# EAGLE board precharge_schematic (EAGLE 9.6.2)
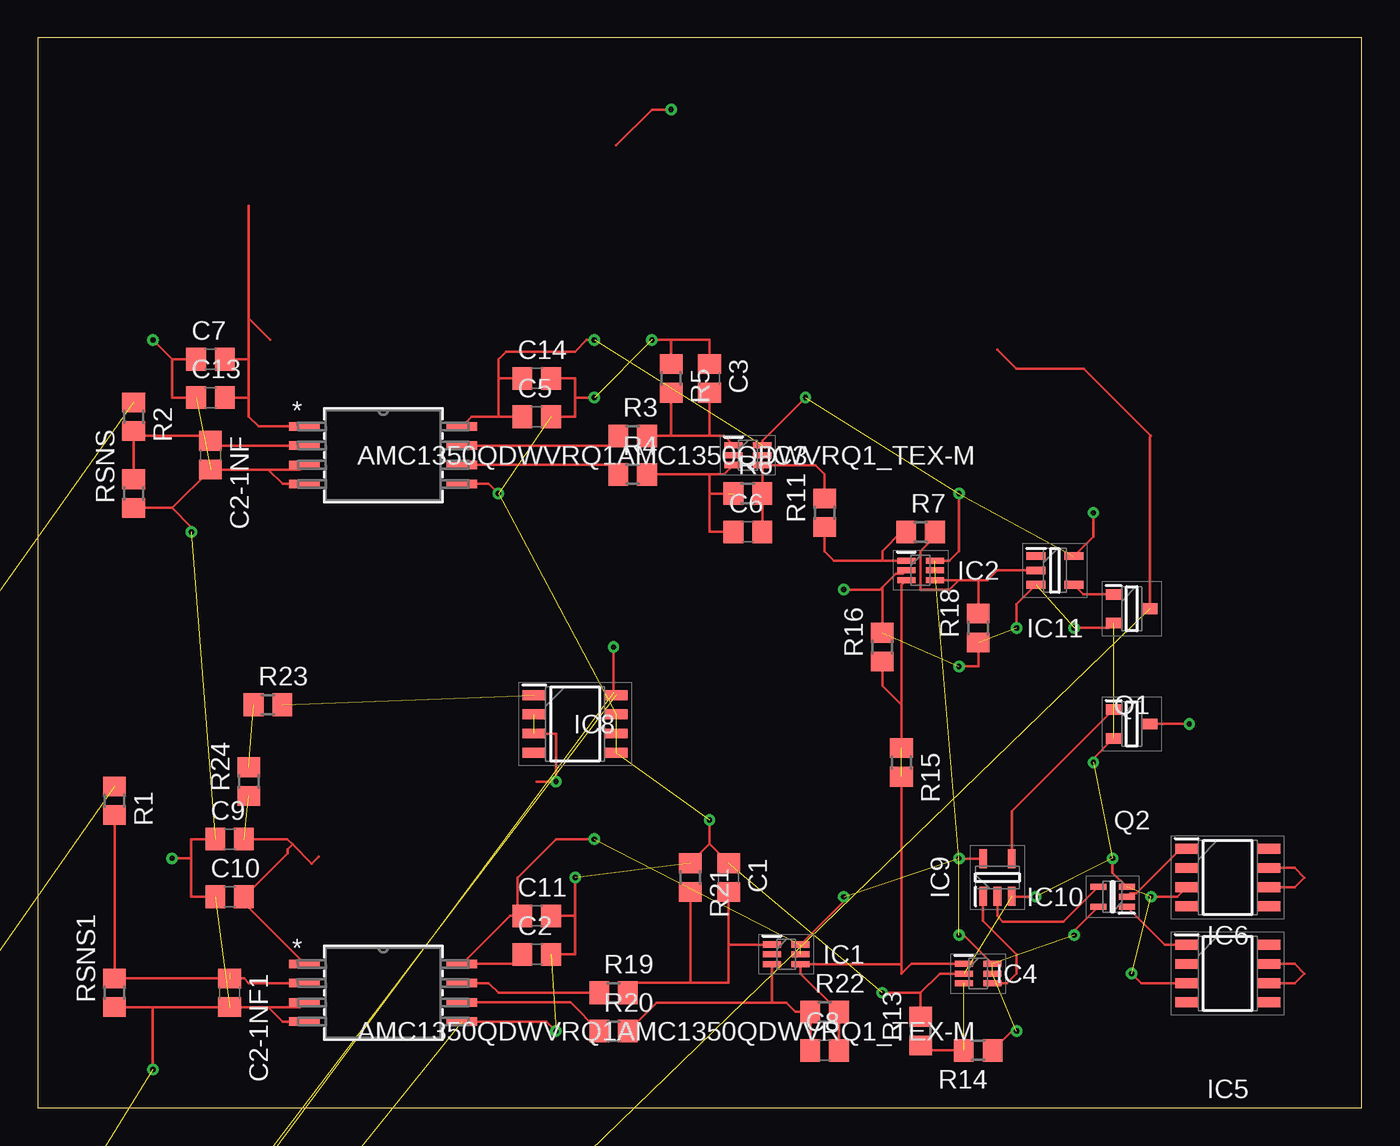
[diagram p0: board, top side]
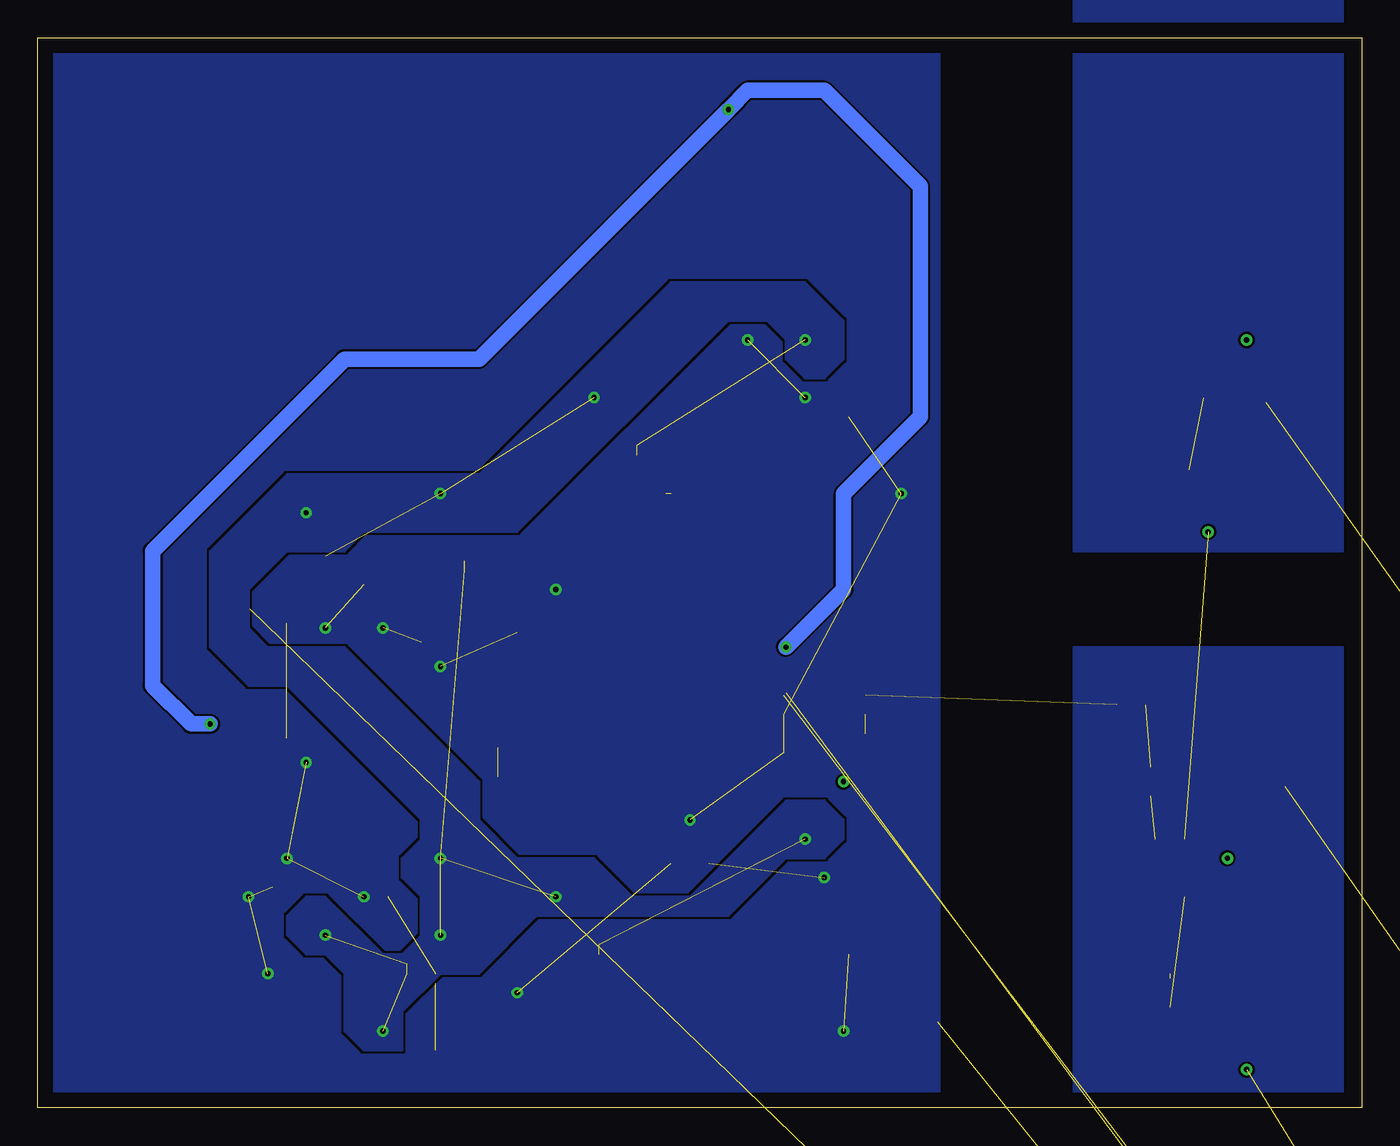
[diagram p1: board, bottom side, seen from below]

Size 87.61 x 70.79 mm. Coordinates in mm from the lower left corner, seen from the top.
Outline: 0,0 87.61,0 87.61,70.79 0,70.79 0,0
Copper layers (1*16): Top 0.035mm / dielectric 1.5mm / Bottom 0.035mm
Design rules "default": minimum track width 6mil, minimum drill 0.35mm, track to track 6mil, track to pad 6mil, pad to pad 6mil, via to via 6mil, smd to smd 6mil, copper to edge 40mil, drill to drill 6mil, minimum pad ring 10mil, minimum via ring 8mil, stop-mask expansion 4mil, vias tented up to drill 0mil, thermal gap 10mil

## Footprints (pad centres in the part's own frame; a part is rotated, then mirrored left to right if it is on the bottom)
C0805 = smd 1.3 x 1.5: 1 -0.95,0; 2 0.95,0
SOT65P210X110-6N = smd 1.2 x 0.4: 1 -0.95,0.65; 2 -0.95,0; 3 -0.95,-0.65; 4 0.95,-0.65; 5 0.95,0; 6 0.95,0.65
SOIC127P599X175-8N = smd 1.526 x 0.65: 1 -2.712,1.905; 2 -2.712,0.635; 3 -2.712,-0.635; 4 -2.712,-1.905; 5 2.712,-1.905; 6 2.712,-0.635; 7 2.712,0.635; 8 2.712,1.905
SOT95P275X110-5N = smd 1.25 x 0.5: 1 -1.25,0.95; 2 -1.25,0; 3 -1.25,-0.95; 4 1.25,-0.95; 5 1.25,0.95
SOT65P212X110-5N = smd 1.05 x 0.4: 1 -0.95,0.65; 2 -0.95,0; 3 -0.95,-0.65; 4 0.95,-0.65; 5 0.95,0.65
214450982 = drill 1.02 pad 1.53 square: 1 0,0 | drill 1.02 pad 1.53: 2 -3,0 | hole 3.05: -1.5,-4.32
T816108A1S102CEU = drill 1.02 pad 1.53 square: 1 0,0 | drill 1.02 pad 1.53: 2 0,2.54; 3 2.54,0; 4 2.54,2.54; 5 5.08,0; 6 5.08,2.54; 7 7.62,0; 8 7.62,2.54
PDSE1S12S12MTR = smd 1 x 2.1: 1 -3.81,-5.05; 2 -1.27,-5.05; 4 3.81,-5.05; 5 3.81,5.05; 8 -3.81,5.05
SOT95P240X120-3N = smd 1 x 0.7: 1 -1.2,0.95; 2 -1.2,-0.95; 3 1.2,0
R0805 = smd 1.3 x 1.5: 1 -0.95,0; 2 0.95,0
AMC1350QDWVRQ1_TEX-M = smd 2.007 x 0.559: 1 -5.207,1.905; 2 -5.207,0.635; 3 -5.207,-0.635; 4 -5.207,-1.905; 5 5.207,-1.905; 6 5.207,-0.635; 7 5.207,0.635; 8 5.207,1.905

## Placement (x,y rotation side)
C1  [C0805]  45.72,15.24 270 top
C2  [C0805]  33.02,10.16 0 top
C2-1NF  [C0805]  11.43,43.18 270 top
C2-1NF1  [C0805]  12.7,7.62 270 top
C3  [C0805]  44.45,48.26 270 top
C4  [C0805]  -86.36,83.82 0 top  (outside the outline)
C5  [C0805]  33.02,45.72 0 top
C6  [C0805]  46.99,38.1 0 top
C7  [C0805]  11.43,49.53 0 top
C8  [C0805]  52.07,3.81 0 top
C9  [C0805]  12.7,17.78 0 top
C10  [C0805]  12.7,13.97 0 top
C11  [C0805]  33.02,12.7 0 top
C13  [C0805]  11.43,46.99 0 top
C14  [C0805]  33.02,48.26 0 top
IC1  TLV9001SIDCKR  [SOT65P210X110-6N]  49.53,10.16 0 top
IC2  TLV9001SIDCKR  [SOT65P210X110-6N]  58.42,35.56 0 top
IC3  TLV9001SIDCKR  [SOT65P210X110-6N]  46.99,43.18 0 top
IC4  TLV9001SIDCKR  [SOT65P210X110-6N]  62.23,8.89 0 top
IC5  LT1129CS8-3.3#PBF  [SOIC127P599X175-8N]  78.74,8.89 0 top
IC6  LT1129CS8-3.3#PBF  [SOIC127P599X175-8N]  78.74,15.24 0 top
IC8  LT1129CS8-3.3#PBF  [SOIC127P599X175-8N]  35.56,25.4 0 top
IC9  74AHC1G08GV,125  [SOT95P275X110-5N]  63.5,15.24 90 top
IC10  74HC1G86GW-Q100H  [SOT65P212X110-5N]  71.12,13.97 180 top
IC11  74LVC1G32GV,125  [SOT95P275X110-5N]  67.31,35.56 0 top
J2  2-1445098-2  [214450982]  -80.01,-62.23 0 top  (outside the outline)
J3  2-1445098-2  [214450982]  -80.01,-74.93 0 top  (outside the outline)
J4  2-1445098-2  [214450982]  -80.01,-87.63 0 top  (outside the outline)
J5  2-1445098-2  [214450982]  -80.01,-100.33 0 top  (outside the outline)
J6  T816108A1S102CEU  [T816108A1S102CEU]  -81.28,-116.84 0 top  (outside the outline)
PS1  PDSE1-S12-S12-M-TR  [PDSE1S12S12MTR]  -80.01,-128.27 0 top  (outside the outline)
Q1  BSS138  [SOT95P240X120-3N]  72.39,33.02 0 top
Q2  BSS138  [SOT95P240X120-3N]  72.39,25.4 0 top
R1  [R0805]  5.08,20.32 270 top
R2  [R0805]  6.35,45.72 270 top
R3  [R0805]  39.37,44.45 0 top
R4  [R0805]  39.37,41.91 0 top
R5  [R0805]  41.91,48.26 270 top
R6  [R0805]  46.99,40.64 0 top
R7  [R0805]  58.42,38.1 0 top
R8  [R0805]  -60.96,83.82 0 top  (outside the outline)
R9  [R0805]  -66.04,83.82 0 top  (outside the outline)
R11  [R0805]  52.07,39.37 90 top
R13  [R0805]  58.42,5.08 90 top
R14  [R0805]  62.23,3.81 180 top
R15  [R0805]  57.15,22.86 270 top
R16  [R0805]  55.88,30.48 90 top
R17  [R0805]  -22.86,78.74 0 top  (outside the outline)
R18  [R0805]  62.23,31.75 90 top
R19  [R0805]  38.1,7.62 0 top
R20  [R0805]  38.1,5.08 0 top
R21  [R0805]  43.18,15.24 270 top
R22  [R0805]  52.07,6.35 0 top
R23  [R0805]  15.24,26.67 0 top
R24  [R0805]  13.97,21.59 90 top
RSNS  [R0805]  6.35,40.64 90 top
RSNS1  [R0805]  5.08,7.62 90 top
U1  AMC1350QDWVRQ1AMC1350QDWVRQ1_TEX-M  [AMC1350QDWVRQ1_TEX-M]  22.86,43.18 0 top
U2  AMC1350QDWVRQ1AMC1350QDWVRQ1_TEX-M  [AMC1350QDWVRQ1_TEX-M]  22.86,7.62 0 top

## Library data of the parts
C1 C2 C2-1NF C2-1NF1 C3-C11 C13 C14 = rcl; SPICEPREFIX: C
IC1-IC4 = TLV9001SIDCKR; ARROW_PART_NUMBER: TLV9001SIDCKR; ARROW_PRICE-STOCK: https://www.arrow.com/en/products/tlv9001sidckr/texas-instruments?region=nac; DESCRIPTION: Operational Amplifiers - Op Amps 1-Channel, 1MHz, RRIO, 1.8V to 5.5V Operational Amplifier for Cost-Optimized Systems 6-SC70 -40 to 125; HEIGHT: 1.1mm; MANUFACTURER_NAME: Texas Instruments; MANUFACTURER_PART_NUMBER: TLV9001SIDCKR; MOUSER_PART_NUMBER: 595-TLV9001SIDCKR; MOUSER_PRICE-STOCK: https://www.mouser.co.uk/ProductDetail/Texas-Instruments/TLV9001SIDCKR?qs=OlC7AqGiEDm%252BHGQGq0Yv1w%3D%3D
IC5 IC6 IC8 = LT1129CS8-3.3#PBF; ARROW_PART_NUMBER: LT1129CS8-3.3#PBF; ARROW_PRICE-STOCK: https://www.arrow.com/en/products/lt1129cs8-3.3pbf/analog-devices?region=nac; DESCRIPTION: Linear Technology LT1129CS8-3.3#PBF, LDO Voltage Regulator, 700mA, 3.3 V, -30 30 Vin, 8-Pin; HEIGHT: 1.752mm; MANUFACTURER_NAME: Analog Devices; MANUFACTURER_PART_NUMBER: LT1129CS8-3.3#PBF; MOUSER_PART_NUMBER: 584-LT1129CS8-3.3PBF; MOUSER_PRICE-STOCK: https://www.mouser.co.uk/ProductDetail/Analog-Devices/LT1129CS8-3.3PBF?qs=ytflclh7QUUPxIiRT3KdTw%3D%3D
IC9 = 74AHC1G08GV_125; ARROW_PART_NUMBER: 74AHC1G08GV,125; ARROW_PRICE-STOCK: https://www.arrow.com/en/products/74ahc1g08gv125/nexperia?region=nac; DESCRIPTION: 74AHC(T)1G08 - 2-input AND gate@en-us; HEIGHT: 1.1mm; MANUFACTURER_NAME: Nexperia; MANUFACTURER_PART_NUMBER: 74AHC1G08GV,125; MOUSER_PART_NUMBER: 771-AHC1G08GV125; MOUSER_PRICE-STOCK: https://www.mouser.co.uk/ProductDetail/Nexperia/74AHC1G08GV125?qs=P62ublwmbi9ONADOQCr7Sg%3D%3D
IC10 = 74HC1G86GW-Q100H; ARROW_PART_NUMBER: 74HC1G86GW-Q100H; ARROW_PRICE-STOCK: https://www.arrow.com/en/products/74hc1g86gw-q100h/nexperia?region=nac; DESCRIPTION: 74HC(T)1G86-Q100 - 2-input EXCLUSIVE-OR gate@en-us; HEIGHT: 1.1mm; MANUFACTURER_NAME: Nexperia; MANUFACTURER_PART_NUMBER: 74HC1G86GW-Q100H; MOUSER_PART_NUMBER: 771-74HC1G86GW-Q100H; MOUSER_PRICE-STOCK: https://www.mouser.co.uk/ProductDetail/Nexperia/74HC1G86GW-Q100H?qs=5XOdhvmYM0PgVyXumaLcbw%3D%3D
IC11 = 74LVC1G32GV_125; ARROW_PART_NUMBER: 74LVC1G32GV,125; ARROW_PRICE-STOCK: https://www.arrow.com/en/products/74lvc1g32gv125/nexperia?region=asia; DESCRIPTION: NEXPERIA - 74LVC1G32GV,125 - OR GATE, SINGLE, 2 I/P, SC-74A-5; HEIGHT: 1.1mm; MANUFACTURER_NAME: Nexperia; MANUFACTURER_PART_NUMBER: 74LVC1G32GV,125; MOUSER_PART_NUMBER: 771-LVC1G32GV125; MOUSER_PRICE-STOCK: https://www.mouser.co.uk/ProductDetail/Nexperia/74LVC1G32GV125?qs=me8TqzrmIYXExQH4V9SARg%3D%3D
J2-J5 = Micro-mate 2-1445098-2; ARROW_PART_NUMBER: 2-1445098-2; ARROW_PRICE-STOCK: https://www.arrow.com/en/products/2-1445098-2/te-connectivity; DESCRIPTION: Micro Mate-N-Lok Header shrouded 2way; HEIGHT: 5.67mm; MANUFACTURER_NAME: TE Connectivity; MANUFACTURER_PART_NUMBER: 2-1445098-2; MOUSER_PART_NUMBER: 571-2-1445098-2; MOUSER_PRICE-STOCK: https://www.mouser.co.uk/ProductDetail/TE-Connectivity-AMP/2-1445098-2?qs=Eu63EZxBwKKSsdV7%2Fa6T1Q%3D%3D
J6 = T816108A1S102CEU; DESCRIPTION: Amphenol T816 Series, 2.54mm Pitch 8 Way 2 Row Straight PCB Header, Solder Termination, 3A; HEIGHT: 27.2mm; MANUFACTURER_NAME: Amphenol; MANUFACTURER_PART_NUMBER: T816108A1S102CEU
PS1 = PDSE1-S12-S12-M-TR; DESCRIPTION: Isolated DC/DC Converters; HEIGHT: 7.5mm; MANUFACTURER_NAME: CUI Inc.; MANUFACTURER_PART_NUMBER: PDSE1-S12-S12-M-TR; MOUSER_PART_NUMBER: 490-PDSE1-S12-S12MTR; MOUSER_PRICE-STOCK: https://www.mouser.co.uk/ProductDetail/CUI-Inc/PDSE1-S12-S12-M-TR?qs=Jslch3jnSjmXCGD3QPvcow%3D%3D
Q1 Q2 = BSS138; ARROW_PART_NUMBER: BSS138; ARROW_PRICE-STOCK: https://www.arrow.com/en/products/bss138/on-semiconductor; DESCRIPTION: N-channel MOSFET,BSS138 0.2A 50V; HEIGHT: 1.2mm; MANUFACTURER_NAME: onsemi; MANUFACTURER_PART_NUMBER: BSS138; MOUSER_PART_NUMBER: 512-BSS138; MOUSER_PRICE-STOCK: https://www.mouser.co.uk/ProductDetail/ON-Semiconductor-Fairchild/BSS138?qs=HK%252BeIG1iaahCeqBvjB4arg%3D%3D
R1-R9 R11 R13-R24 RSNS RSNS1 = rcl; SPICEPREFIX: R
U1 U2 = AMC1350QDWVRQ1; COPYRIGHT: Copyright (C) 2022 Ultra Librarian. All rights reserved.; MANUFACTURER_PART_NUMBER: AMC1350; MFR_NAME: Texas Instruments

## Nets
3V3: C2.1 C5.1 C11.1 C14.1 IC1.5 IC1.6 IC2.5 IC2.6 IC3.5 IC3.6 IC4.5 IC4.6 IC9.5 IC10.5 IC11.5 R14.1 U1.8 U2.8
+12V: PS1.2 Q2.3
CHARGE_POWER: IC6.8
GND: C1.1 C2.2 C3.1 C5.2 C11.2 C14.2 IC2.2 IC4.2 IC5.3 IC6.3 IC8.5 IC8.6 IC8.7 IC9.3 IC10.3 IC11.3 PS1.1 Q1.2 Q2.2 R5.1 R13.2 R16.2 R18.1 R21.1 U1.5 U2.5
GND(LV): C2-1NF1.2 C2-1NF.2 C7.1 C9.1 C10.1 C13.1 PS1.4 RSNS1.1 RSNS.1 U1.3 U1.4 U2.3 U2.4
N$1: C2-1NF.1 R2.2 RSNS.2 U1.2
N$2: C6.2 IC3.4 R6.2 R11.2
N$3: R4.1 U1.6
N$4: R3.1 U1.7
N$5: C2-1NF1.1 R1.2 RSNS1.2 U2.2
N$6: C3.2 IC3.1 R3.2 R5.2
N$7: C6.1 IC3.3 R4.2 R6.1
N$8: IC2.4 IC11.2 R7.2 R18.2
N$9: R19.1 U2.7
N$10: R20.1 U2.6
N$11: C1.2 IC1.1 R19.2 R21.2
N$12: J2.1 J2.2
N$13: C8.1 IC1.3 R20.2 R22.1
N$14: J4.1 J4.2
N$15: IC8.2 IC8.3
N$16: C8.2 IC1.4 IC2.3 IC4.1 R15.1 R15.2 R16.1 R22.2
N$17: IC4.3 R13.1 R14.2
N$18: IC2.1 R7.1 R11.1
N$19: IC4.4 IC9.1
N$20: IC8.8 PS1.5
N$21: R23.1 R24.2
N$26: IC8.1 R23.2
N$28: C9.2 C10.2 R24.1 U2.1
N$29: C7.2 C13.2 U1.1
N$32: IC6.1 IC10.2
N$33: IC5.1 IC10.1
N$34: IC9.2 IC10.4
N$35: IC9.4 Q2.1
N$36: IC6.6 IC6.7
N$37: IC5.6 IC5.7
N$38: IC11.4 Q1.1
PRECHARGE_DECISION: J6.1 Q1.3
READY_POWER: IC5.8
TS+(CAR): J3.1 J3.2 R2.1
TS+(CELLS): J5.1 J5.2 R1.1

## Tracks (layer width: path | path; a pad name or v marks a point on that pad's centre or on a via)
3V3  (via drill 0.35)  (13 unrouted)
  Top 0.152: U1.8 28.7,45.72 30.48,45.72 | 30.48,45.72 C5.1 | 30.48,45.72 30.48,48.26 | C14.1 30.48,48.26 | 30.48,48.26 30.48,49.53 30.99,50.04 35.56,50.04 36.32,50.8 v36.83,50.8 | C2.1 31.43,9.53 U2.8 31.24,12.7 31.75,12.7 | 31.75,12.7 C11.1 | IC3.6 47.94,44.13 v50.8,46.99 | v53.34,13.97 53.34,13.67 IC1.6 | 31.75,12.7 31.75,15.24 34.29,17.78 v36.83,17.78 | IC2.6 60.34,36.21 60.96,36.83 v60.96,40.64 | IC11.5 69.85,37.8 v69.85,39.37 | R14.1 64.45,5.08 v64.77,5.08 | IC4.6 61.29,11.43 v60.96,11.43 | IC9.5 60.98,16.49 v60.96,16.51 | IC10.5 68.58,11.73 v68.58,11.43
  pour Bottom: 36.83,54.61 34.29,52.07 34.29,49.53 35.56,48.26 36.83,48.26 38.1,49.53 38.1,50.8 39.37,52.07 41.91,52.07 55.88,38.1 66.04,38.1 67.31,36.83 71.12,36.83 73.66,34.29 73.66,31.75 72.39,30.48 67.31,30.48 58.42,21.59 58.42,19.05 55.88,16.51 50.8,16.51 48.26,13.97 44.45,13.97 38.1,20.32 35.56,20.32 34.29,19.05 34.29,17.78 35.56,16.51 38.1,16.51 41.91,12.7 54.61,12.7 58.42,8.89 60.96,8.89 63.5,6.35 63.5,3.81 66.04,3.81 67.31,5.08 67.31,8.89 68.58,10.16 69.85,10.16 71.12,11.43 71.12,12.7 69.85,13.97 68.58,13.97 64.77,10.16 63.5,10.16 62.23,11.43 62.23,13.97 63.5,15.24 63.5,16.51 62.23,17.78 62.23,19.05 71.12,27.94 73.66,27.94 76.2,30.48 76.2,36.83 71.12,41.91 58.42,41.91 45.72,54.61
+12V  (via drill 0.35)  (1 unrouted)
  Top 0.152: 38.27,63.67 40.64,66.04 v41.91,66.04 | 38.1,27.48 v38.1,30.48 | Q2.3 v76.2,25.4
  Bottom 1.016: v38.1,30.48 34.29,34.29 34.29,40.64 29.21,45.72 29.21,60.96 35.56,67.31 40.64,67.31 v41.91,66.04 58.42,49.53 67.31,49.53 80.01,36.83 80.01,27.94 77.47,25.4 v76.2,25.4
GND  (via drill 0.35)  (19 unrouted)
  Top 0.152: C14.2 35.56,48.26 35.56,46.99 | 35.56,46.99 35.56,45.72 C5.2 | 35.56,46.99 v36.83,46.99 | U1.5 29.84,41.27 v30.48,40.64 | R5.1 41.91,50.8 | 41.91,50.8 44.45,50.8 C3.1 | 41.91,50.8 v40.64,50.8 | C2.2 35.56,10.16 35.56,12.7 | 35.56,12.7 C11.2 | 35.56,12.7 v35.56,15.24 | C1.1 44.45,17.46 | v44.45,19.05 44.45,17.46 | IC2.2 57.25,35.34 56.77,35.34 55.88,34.44 | R16.2 55.88,34.44 | 55.88,34.44 55.73,34.29 v53.34,34.29 | IC11.3 64.77,33.32 v64.77,31.75 | R18.1 62.23,29.21 v60.96,29.21 | Q1.2 70.87,31.75 v68.58,31.75 | 44.45,17.46 R21.1 | IC4.2 59.69,8.89 58.42,7.62 | 58.42,7.62 R13.2 | 58.42,7.62 v55.88,7.62 | IC9.3 64.47,13.97 v66.04,13.97 | Q2.2 69.85,23.11 v69.85,22.86 | IC10.3 71.12,15.57 v71.12,16.51 | IC6.3 75.39,13.97 v73.66,13.97 | IC5.3 73.03,8.26 v72.39,8.89 | U2.5 33.66,5.71 v34.29,5.08
  pour Bottom (rank 2): 27.94,97.79 27.94,0 29.21,-1.27 158.75,-1.27 158.75,100.33 30.48,100.33
GND1
  pour Bottom: 1.27,99.06 1.27,36.83 19.05,36.83 19.05,99.06
GND2
  pour Bottom: 1.27,30.48 19.05,30.48 19.05,0 1.27,0
GND(LV)  (via drill 0.35)  (4 unrouted)
  Top 0.152: U1.3 17.34,42.23 15.24,42.23 | 15.24,42.23 C2-1NF.2 8.89,39.69 | U1.4 16.2,41.27 15.24,42.23 | RSNS.1 8.89,39.69 | 8.89,39.69 10.16,38.42 v10.16,38.1 | U2.3 17.34,6.67 15.24,6.67 | 15.24,6.67 C2-1NF1.2 7.62,6.67 | U2.4 16.2,5.71 15.24,6.67 | 7.62,6.67 RSNS1.1 | v7.62,2.54 7.62,6.67 | C13.1 8.89,46.99 8.89,49.53 | 8.89,49.53 C7.1 | 8.89,49.53 v7.62,50.8 | C9.1 10.16,17.78 10.16,16.51 | 10.16,16.51 10.16,13.97 C10.1 | v8.89,16.51 10.16,16.51
N$1
  Top 0.152: RSNS.2 6.35,44.45 | 6.35,44.45 R2.2 | U1.2 11.74,43.81 C2-1NF.1 11.11,44.45 6.35,44.45
N$2
  Top 0.152: C6.2 R6.2 IC3.4 51.45,42.53 52.07,41.91 R11.2
N$3
  Top 0.152: U1.6 37.78,42.55 R4.1
N$4
  Top 0.152: U1.7 37.78,43.81 R3.1
N$5  (1 unrouted)
  Top 0.152: 12.7,8.89 12.38,8.57 RSNS1.2 R1.2 | U2.2 13.97,8.26 13.65,8.57 C2-1NF1.1
N$6
  Top 0.152: R3.2 41.91,44.45 | 41.91,44.45 44.45,44.45 | 44.45,44.45 45.42,44.45 IC3.1 | 41.91,44.45 R5.2 | C3.2 44.45,44.45
N$7  (1 unrouted)
  Top 0.152: R4.2 44.45,41.91 | 44.45,41.91 45.42,41.91 IC3.3 | 44.45,41.91 44.45,40.64 | 44.45,40.64 45.72,40.64 | 44.45,40.64 44.45,38.1 C6.1
N$8
  Top 0.152: IC2.4 60.96,34.91 | 60.96,34.91 62.23,34.91 | 62.23,34.91 62.85,34.91 63.5,35.56 IC11.2 | R7.2 59.37,37.78 58.42,36.83 58.42,34.29 60.34,34.29 60.96,34.91 | 62.23,34.91 R18.2
N$9
  Top 0.152: U2.7 29.84,8.26 30.48,7.62 R19.1
N$10
  Top 0.152: U2.6 35.24,6.99 R20.1
N$11
  Top 0.152: R19.2 39.7,8.27 43.18,8.27 | 43.18,8.27 45.72,8.27 45.72,10.81 | 45.72,10.81 IC1.1 | R21.2 43.18,8.27 | C1.2 45.72,10.81
N$12  (1 unrouted)
N$13
  Top 0.152: R20.2 40.94,6.97 48.58,6.97 | 48.58,6.97 49.53,6.97 50.15,6.35 R22.1 C8.1 | 48.58,6.97 IC1.3
N$14  (1 unrouted)
N$15  (via drill 0.35)  (1 unrouted)
  Top 0.152: 32.99,21.59 v34.29,21.59 34.29,24.77 IC8.3
N$16  (1 unrouted)
  Top 0.152: C8.2 R22.2 50.48,8.89 IC1.4 57.15,9.51 | 57.15,9.51 57.15,8.89 57.8,9.54 IC4.1 | 57.15,9.51 R15.2 | R15.1 57.15,26.67 | 57.15,26.67 55.88,27.94 R16.1 | 57.15,26.67 57.15,34.59 IC2.3
N$17  (1 unrouted)
  Top 0.152: R14.2 58.74,3.81 R13.1
N$18
  Top 0.152: R11.1 52.07,36.83 52.69,36.21 55.88,36.21 | 55.88,36.21 IC2.1 | 55.88,36.21 55.88,36.83 57.15,38.1 R7.1
N$19
  Top 0.152: IC4.4 64.12,8.24 64.77,8.89 64.77,10.16 62.55,12.38 IC9.1
N$20  (1 unrouted)
N$21  (1 unrouted)
N$26  (1 unrouted)
N$28  (1 unrouted)
  Top 0.152: 16.86,17.43 16.53,17.11 16.53,16.85 C10.2 13.65,13.53 U2.1 | 18.59,16.62 18.13,16.16 16.86,17.43 | C9.2 16.51,17.78 16.86,17.43
N$29
  Top 0.152: U1.1 14.61,45.09 13.97,45.72 13.97,46.99 | 13.97,46.99 C13.2 | 13.97,46.99 13.97,49.53 | 13.97,49.53 C7.2 | 13.97,49.53 13.97,52.24 | 15.38,50.83 13.97,52.24 | 13.97,52.24 13.97,59.69
N$32
  Top 0.152: IC10.2 72.29,14.19 72.69,14.19 75.64,17.14 IC6.1
N$33
  Top 0.152: IC10.1 74.59,10.79 IC5.1
N$34
  Top 0.152: IC9.2 63.5,12.7 63.88,12.32 67.87,12.32 IC10.4
N$35
  Top 0.152: IC9.4 64.45,19.61 Q2.1
N$36
  Top 0.152: IC6.7 83.19,15.88 83.82,15.24 83.19,14.61 IC6.6
N$37
  Top 0.152: IC5.7 83.19,9.53 83.82,8.89 83.19,8.26 IC5.6
N$38
  Top 0.152: IC11.4 69.2,33.97 Q1.1
PRECHARGE_DECISION  (1 unrouted)
  Top 0.152: Q1.3 73.59,44.38 73.66,44.45 69.22,48.9 64.77,48.9 63.5,50.16
TS+(CAR)  (2 unrouted)
TS+(CELLS)  (2 unrouted)